# Altium PCB 400479.PcbDoc (part 1 of 2)
Units mm, origin at the board's own origin, x right, y up, seen from the top; angles counter-clockwise.
Board outline 46.04 x 15.24 mm, 4 copper layers (Top Layer, Mid-Layer 1, Mid-Layer 2, Bottom Layer), stack 2.007 mm thick; 83 components, 46 nets, 247 pads, 135 vias.
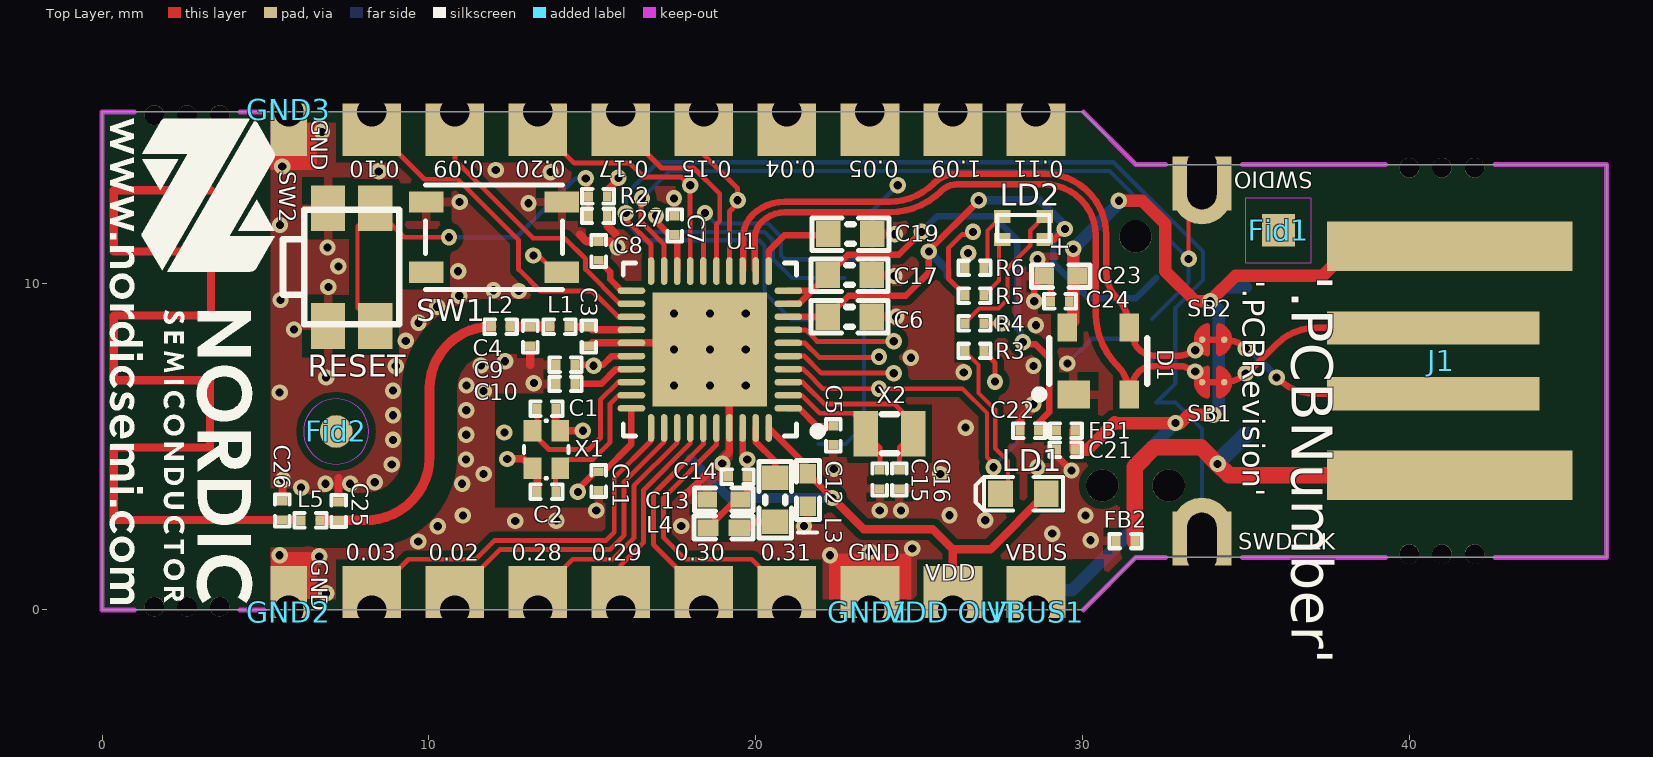
[diagram p0: Top Layer view]
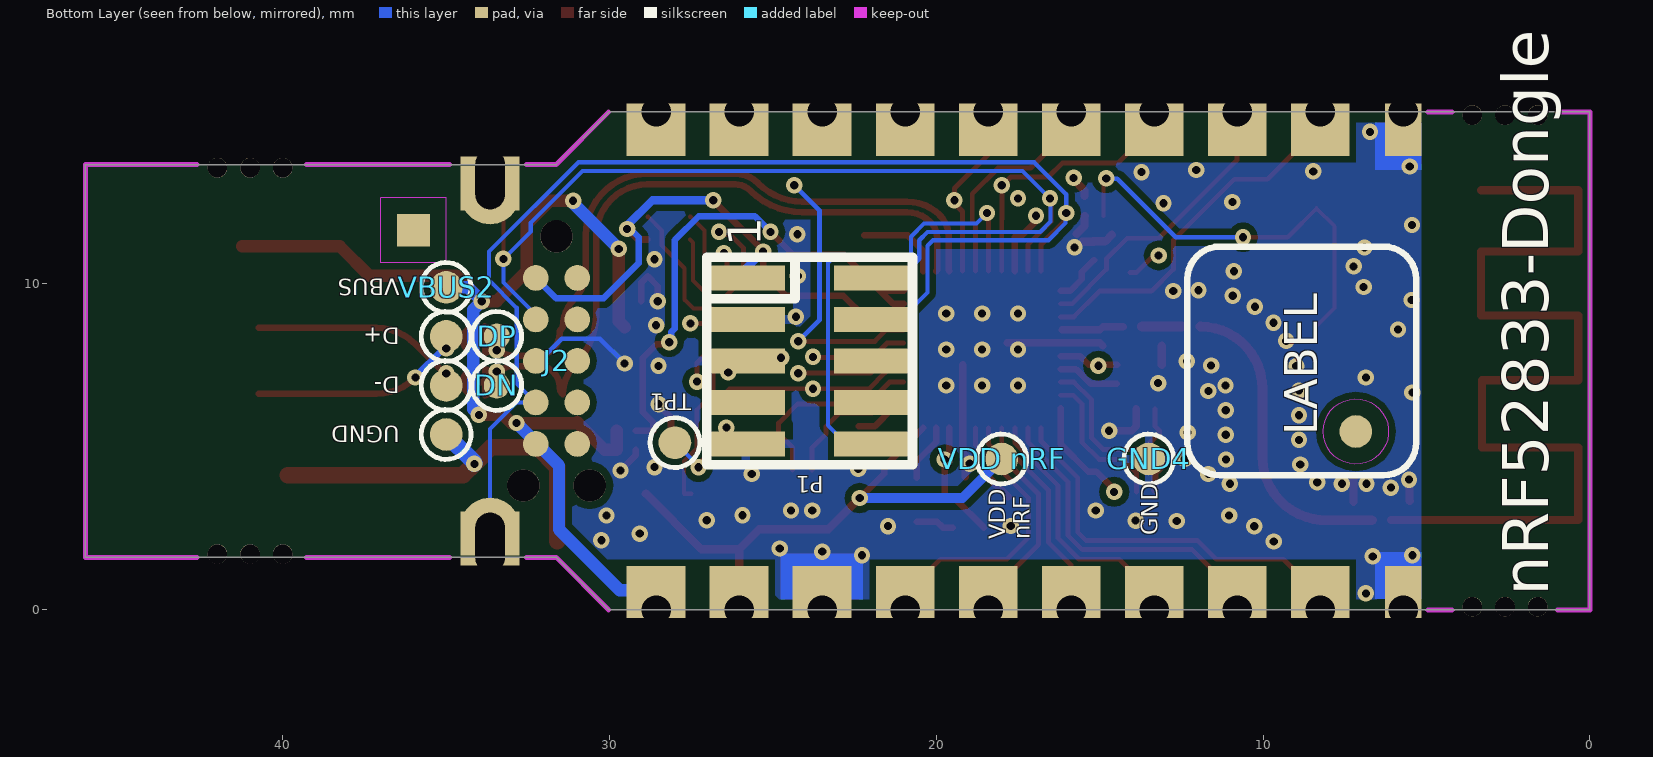
[diagram p1: Bottom Layer view, seen from below]
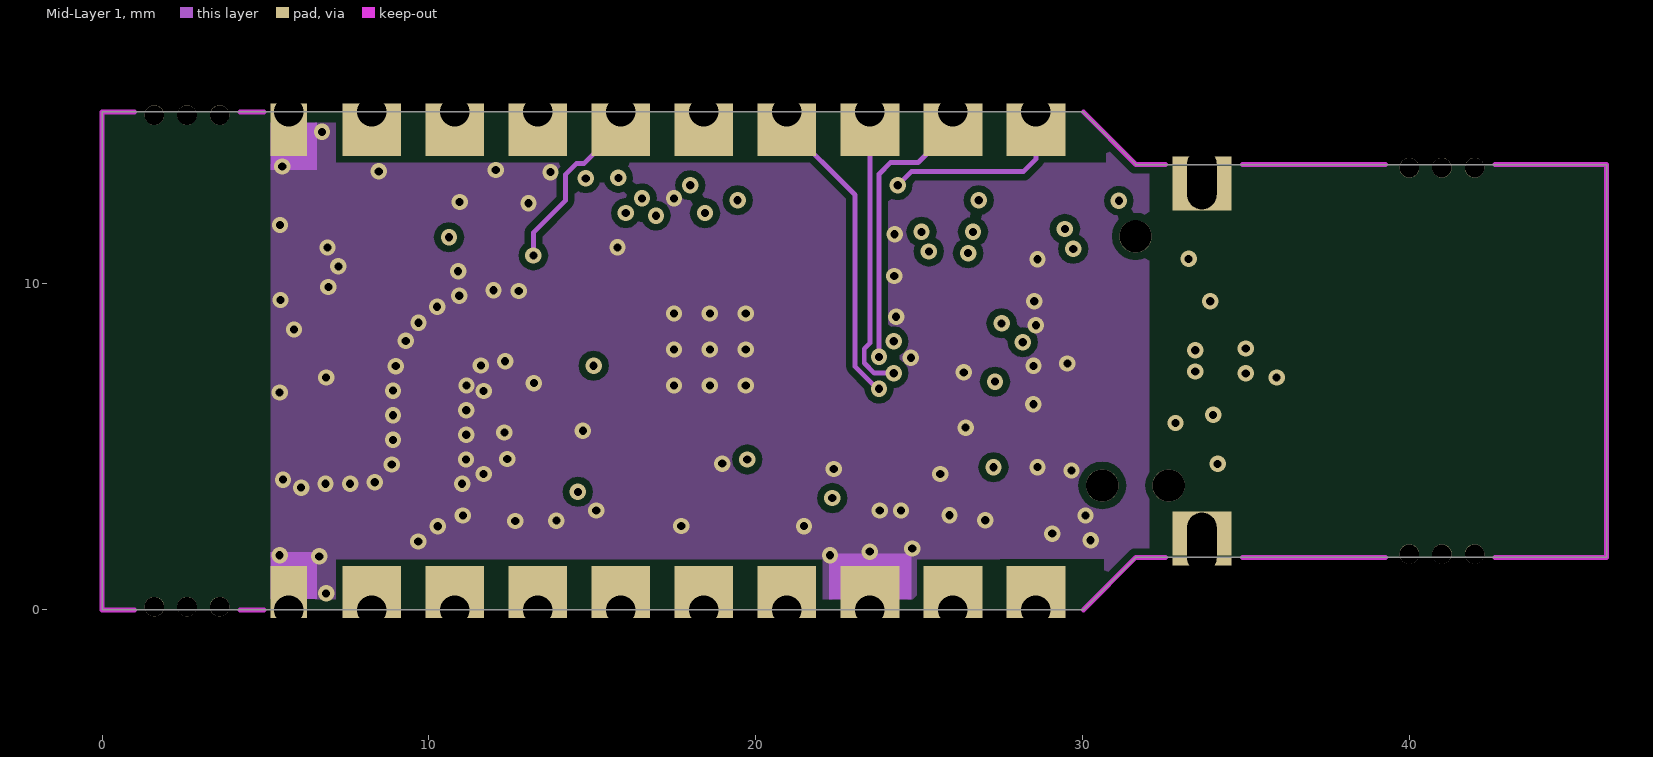
[diagram p2: Mid-Layer 1]
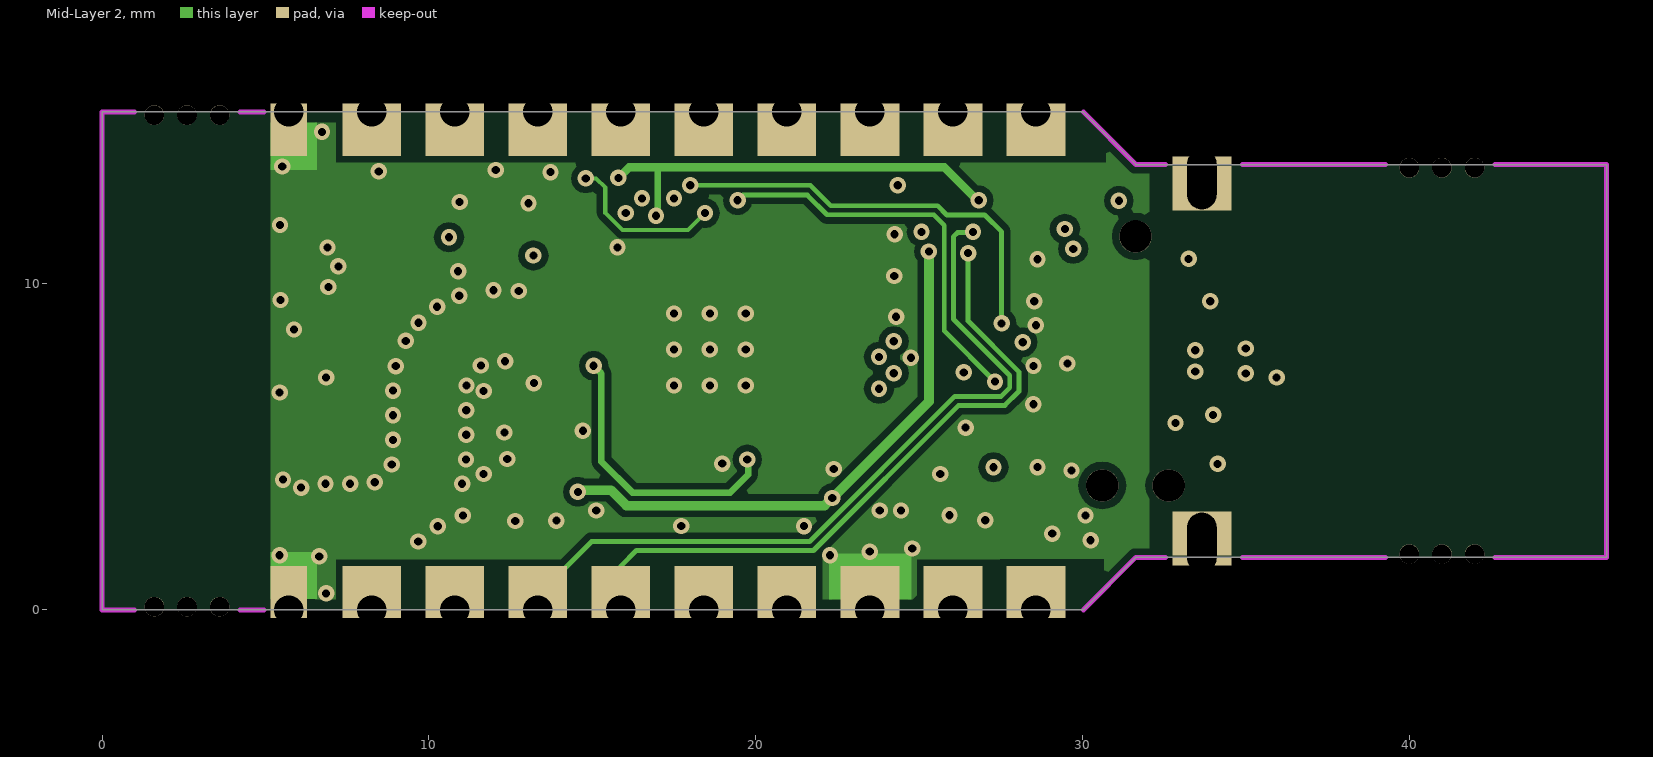
[diagram p3: Mid-Layer 2]

## Layer stack, top to bottom
Top Solder: solder mask 0.018, Solder Resist, Dk 3.5
Top Layer: signal copper 0.018
Dielectric1: prepreg 0.1, FR-4, Dk 4.1
Mid-Layer 1: signal copper 0.0356
Dielectric2: core 1.7, FR-4, Dk 4.5
Mid-Layer 2: signal copper 0.0356
Dielectric3: prepreg 0.1, FR-4, Dk 4.1
Bottom Layer: signal copper 0.018
Bottom Solder: solder mask 0.018, Solder Resist, Dk 3.5

## Board outline
0,0 0,15.24 30.027,15.24 31.637,13.63 46.039,13.63 46.039,1.61 31.637,1.61 30.027,0

## Design rules (kind name [scope] priority, off if disabled: settings)
Clearance ANT_Clerance [(InNet('ANT') or InNet('RF') or InNet('NetC4_2')) and (IsTrack or IsArc or IsVia) vs (InNamedPolygon('Top_Layer-GND')) or (InNamedPolygon('Bottom_Layer-GND')) or (InNamedPolygon('Mid_Layer_1-GND')) or (InNamedPolygon('Mid_Layer_2-GND'))] p1: gap=0.7 ignorepadtopadclearanceinfootprint=FALSE
Clearance NPTH [Not PadIsPlated And HoleSize > 0] p2: gap=0.229 ignorepadtopadclearanceinfootprint=FALSE except(0: Arc-Hole Track-Hole SMDPad-Hole THPad-Hole Via-Hole Fill-Hole Poly-Hole Region-Hole Text-Hole)
Clearance Polygon_Clearance [(InNamedPolygon('Top_Layer-GND')) or (InNamedPolygon('Bottom_Layer-GND')) or (InNamedPolygon('Mid_Layer_1-GND')) or (InNamedPolygon('Mid_Layer_2-GND'))] p3: gap=0.203 ignorepadtopadclearanceinfootprint=FALSE
Clearance SB_Clearance [HasFootprint('Solderbridge')] p4: gap=0.127 ignorepadtopadclearanceinfootprint=FALSE except(0: Arc-Hole Track-Hole SMDPad-Hole THPad-Hole Via-Hole Fill-Hole Poly-Hole Region-Hole Text-Hole)
Clearance [All] p5: gap=0.127 ignorepadtopadclearanceinfootprint=FALSE
ComponentClearance [All] p1 off: gap=0.254 collisioncheckmode=3 verticalgap=0.254 showdistances=FALSE
DiffPairsRouting [All] p1: maxlimit=2.54 minlimit=0.127 mostfreqgap=0.127 toplayer_maxgap=0.127 toplayer_minwidth=0.2 toplayer_maxwidth=0.2 toplayer_prefwidth=0.2 midlayer1_minwidth=0.381 midlayer1_maxwidth=0.381 midlayer1_prefwidth=0.381 midlayer2_minwidth=0.381 midlayer2_maxwidth=0.381 midlayer2_prefwidth=0.381 bottomlayer_maxgap=0.127 bottomlayer_minwidth=0.2 bottomlayer_maxwidth=0.2 bottomlayer_prefwidth=0.2 maxuncoupledlength=12.7
FabricationTestPointUsage TestPointUsage [All] p1: valid=0 allowmultiple=FALSE
FabricationTestpoint Testpoint [All] p1: side=3 testpointundercomponent=TRUE minsize=1.016 maxsize=2.54 preferedsize=1.524 minholesize=0 maxholesize=1.016 preferedholesize=0.813 testpointgrid=0.025 allowsidetop=TRUE allowsidebottom=TRUE usegrid=TRUE gridtolerance=0
Height [All] p1 off: minheight=0 maxheight=25.4 prefheight=12.7
HoleSize [All] p1: absolutevalues=TRUE maxlimit=2.54 minlimit=0.1 maxpercent=80.000 minpercent=20.000
MinimumAnnularRing [All] p1 off: minimumring=0.152
PolygonConnect PolygonConnect_1 [isVia and innet(gnd)] p1: connectstyle=Direct reliefconductorwidth=0.254 reliefentries=4 polygonreliefangle="90 Angle" airgapwidth=0.254
PolygonConnect [All] p2: connectstyle=Relief reliefconductorwidth=0.254 reliefentries=4 polygonreliefangle="90 Angle" airgapwidth=0.254
RoutingVias [All] p1: holewidth=0.25 width=0.5 viastyle="Through Hole" minholewidth=0.1 minwidth=0.3 maxholewidth=0.305 maxwidth=0.61
SilkToSolderMaskClearance SilkscreenOverComponentPads [IsPad] p1: minsilkscreentomaskgap=0.254 clearancetoexposedcopper=TRUE
SolderMaskExpansion [All] p1: expansion=0.076 istentingtop=FALSE
Width [All] p1: maxlimit=2.54 minlimit=0.127 preferedwidth=0.152 minimp=50.000000 maximp=50.000000 favimp=50.000000
23 further rules are at their usual default settings.

## Classes and differential pairs
differential pair D: +D_P -D_N

## Components (designator, comment, footprint, x,y, rotation, side; value= is the part's Value field where it differs from the comment)
0.02 "CH" Castellated_Hole_0.9mm 10.795,0 r0 top locked
0.03 "CH" Castellated_Hole_0.9mm 8.255,0 r0 top locked
0.04 "CH" Castellated_Hole_0.9mm 20.955,15.24 r180 top locked
0.05 "CH" Castellated_Hole_0.9mm 23.495,15.24 r180 top locked
0.09 "CH" Castellated_Hole_0.9mm 10.795,15.24 r180 top locked
0.10 "CH" Castellated_Hole_0.9mm 8.255,15.24 r180 top locked
0.11 "CH" Castellated_Hole_0.9mm 28.575,15.24 r180 top locked
0.15 "CH" Castellated_Hole_0.9mm 18.415,15.24 r180 top locked
0.17 "CH" Castellated_Hole_0.9mm 15.875,15.24 r180 top locked
0.20 "CH" Castellated_Hole_0.9mm 13.335,15.24 r180 top locked
0.28 "CH" Castellated_Hole_0.9mm 13.335,0 r0 top locked
0.29 "CH" Castellated_Hole_0.9mm 15.875,0 r0 top locked
0.30 "CH" Castellated_Hole_0.9mm 18.415,0 r0 top locked
0.31 "CH" Castellated_Hole_0.9mm 20.955,0 r0 top locked
1.09 "CH" Castellated_Hole_0.9mm 26.035,15.24 r180 top locked
C1 "12pF" CAPC0603X03L_C 13.596,6.154 r0 top
C2 "12pF" CAPC0603X03L_C 13.596,3.614 r180 top
C3 "1.0pF" CAPC0603X03L_C 14.9,8.37 r90 top
C4 "1.2pF" CAPC0603X03L_C 13.1,8.37 r90 top
C5 "100nF" CAPC0603X03L_C 22.375,5.345 r270 top
C6 "4.7µF" CAPC1608X06L 22.875,8.97 r0 top
C7 "100nF" CAPC0603X03L_C 17.525,11.77 r90 top
C8 "820pF" CAPC0603X03L_C 15.2,10.987 r90 top
C9 "N.C." CAPC0603X03L_C_NC 14.18,7.5 r0 top
C10 "100pF" CAPC0603X03L_C 14.18,6.916 r180 top
C11 "100nF" CAPC0603X03L_C 15.2,3.945 r270 top
C12 "1.0µF" CAPC1005X04L 21.6,3.67 r270 top
C13 "1.0µF" CAPC1005X04L 19.025,3.38 r0 top
C14 "47nF" CAPC0603X03L_C 19.451,4.08 r180 top
C15 "12pF" CAPC0603X03L_C 23.8,3.995 r270 top
C16 "12pF" CAPC0603X03L_C 24.4,3.995 r270 top
C17 "4.7µF" CAPC1608X06L 22.875,10.245 r0 top
C19 "4.7µF" CAPC1608X06L 22.9,11.5 r0 top
C21 "10nF" CAPC0603X03L_C 29.489,4.902 r0 top locked
C22 "100nF" CAPC0603X03L_C 28.372,5.486 r0 top locked
C23 "4.7µF" CAPC1005X04L 29.337,10.211 r0 top locked
C24 "100nF" CAPC0603X03L_C 29.312,9.449 r0 top locked
C25 "N.C." CAPC0603X03L_C_NC 7.239,3.023 r90 top locked
C26 "1.7pF" CAPC0603X03L_C 5.512,3.048 r270 top locked
C27 "100nF" CAPC0603X03L_C 15.173,12.057 r180 top
D1 "PRTR5V0U2X" SOT190P230X110-4L 30.48,7.62 r90 top locked
D+ "Ø1.0mm,SMD" TP_SMD_D1.0mm#1 35,8.37 r180 bottom locked
D- "Ø1.0mm,SMD" TP_SMD_D1.0mm#1 35,6.87 r180 bottom locked
DN "Ø1.0mm,SMD" TP_SMD_D1.0mm#2 33.45,6.87 r270 bottom locked
DP "Ø1.0mm,SMD" TP_SMD_D1.0mm#2 33.45,8.37 r270 bottom locked
FB1 "120R/0.85A" INDC0603X03L_C 29.489,5.486 r180 top locked
FB2 "120R/0.85A" INDC0603X03L_C 31.318,2.108 r180 top locked
Fid1 "Fiducial mark" Fiducial_Square 36,11.62 r0 top locked value=N.A.
Fid2 "Fiducial mark" Fiducial 7.163,5.461 r0 top locked value=N.A.
GND1 "GND" Castellated_Hole_0.9mm 23.495,0 r0 top locked
GND2 "GND" Castellated_Hole_0.9mm_S 5.715,0 r0 top locked
GND3 "GND" Castellated_Hole_0.9mm_S 5.715,15.24 r180 top locked
GND4 "GND" TP_SMD_D1.0mm#1 13.5,4.62 r180 bottom locked
J1 "USB-A" USB-A-PCB 41.039,7.63 r180 top locked
J2 "TC2050-IDC" TC2050-IDC-NLFP 31.623,7.62 r270 bottom locked
L1 "4.7nH" INDC0603X03L_C 14,8.67 r180 top
L2 "2.2nH" INDC0603X03L_C 12.2,8.67 r180 top
L3 "10µH" INDC1608X06L 20.6,3.37 r90 top
L4 "15nH" INDC1005X04L 19.021,2.52 r0 top
L5 "2.7nH" INDC0603X03L_C 6.375,2.743 r180 top locked
LD1 "L0603G" LED_0603_G 28.194,3.556 r0 top locked
LD2 "LED RGB" LED_RGB_0603 28.194,11.684 r90 top locked
P1 "Pin Header 2x5, 1.27mm" HDR_2x5-SMD-1.27mm-NC 23.876,7.62 r270 bottom locked
R2 "10k" RESC0603X03L_C 15.175,12.657 r0 top
R3 "220R" RESC0603X03L_C 26.695,7.925 r0 top locked
R4 "1k2" RESC0603X03L_C 26.695,8.771 r0 top locked
R5 "2k2" RESC0603X03L_C 26.695,9.618 r0 top locked
R6 "390R" RESC0603X03L_C 26.695,10.465 r0 top locked
SB1 "Solderbridge" Solderbridge_Shorted 34,6.97 r0 top locked net-tie
SB2 "Solderbridge" Solderbridge_Shorted 34,8.27 r0 top locked net-tie
SW1 "PB SW" C&K_PTS810 11.995,11.406 r180 top
SW2 "PTS840 GK SMTR LFS" EVQP7A_J_B_K 7.638,10.49 r270 top
SWDCLK "CH" Castellated_Hole_0.9mm_D 33.655,2.06 r0 top locked
SWDIO "CH" Castellated_Hole_0.9mm_D 33.655,13.18 r180 top locked
TP1 "Ø1.0mm,SMD" TP_SMD_D1.0mm#1 28,5.12 r180 bottom locked
U1 "nRF52833-QDAA" QFN40P500X500X50_HS-41N 18.6,7.97 r180 top locked
UGND "Ø1.0mm,SMD" TP_SMD_D1.0mm#1 35,5.37 r180 bottom locked
VBUS1 "VBUS" Castellated_Hole_0.9mm 28.575,0 r0 top locked
VBUS2 "VBUS" TP_SMD_D1.0mm#1 35,9.87 r180 bottom locked
"VDD nRF" "Ø1.0mm,SMD" TP_SMD_D1.0mm#1 18,4.62 r180 bottom locked
"VDD OUT" "CH" Castellated_Hole_0.9mm 26.035,0 r0 top locked
X1 "32MHz" BT-XTAL_1612 13.596,4.909 r270 top
X2 "32.768kHz" XTAL_2012 24.1,5.395 r0 top

## Footprints (in the part's own frame and the unit in brackets; to place one, negate y for a bottom-side part, rotate by r counter-clockwise, add the part's x,y. Pads: shape width x height; smd on the part's side, far side on the other; paste and mask are expansions set on the pad)
BT-XTAL_1612 [mm] "Crystal 1.6 x 1.2 mm"
  rect 0.65x0.55 smd: 1(-0.575,-0.425) 2(0.575,-0.425) 3(0.575,0.425) 4(-0.575,0.425)
  silkscreen extent -0.88,-0.68 0.88,0.68, body extent -0.83,-0.63 0.83,0.63, height 0.41
C&K_PTS810 [mm] "Microminiature SMT Top Actuated"
  rect 1.05x0.65 smd: 0(2.075,1.075) 1(-2.075,1.075) 2(-2.075,-1.075) 2(2.075,-1.075)
  silkscreen extent -2.1,-1.6 2.1,1.6, body extent -2.29,-1.6 2.29,1.6, height 2.5
CAPC0603X03L_C [mm] "Chip Capacitor, 2-Leads, Body 0.6x0.3mm, IPC High Density"
  rect 0.27x0.3 smd: 1(-0.285,0) 2(0.285,0)
  silkscreen extent -0.49,-0.22 0.49,0.22, body extent -0.3,-0.15 0.31,0.15, height 0.3
CAPC0603X03L_C_NC [mm] "Chip Capacitor, 2-Leads, Body 0.6x0.3mm, IPC High Density"
  rect 0.27x0.3 smd mask+0.05: 1(-0.285,0) 2(0.285,0)
  silkscreen extent -0.49,-0.22 0.49,0.22
CAPC1005X04L [mm] "Chip Capacitor, 2-Leads, Body 1.0x0.5mm, IPC High Density"
  rect 0.6x0.5 smd: 1(-0.5,0) 2(0.5,0)
  silkscreen extent -0.9,-0.35 0.9,0.35, body extent -0.51,-0.25 0.51,0.25, height 0.5
CAPC1608X06L [mm] "Chip Capacitor, 2-Leads, Body 1.6x0.8mm, IPC High Density"
  rect 0.75x0.8 smd: 1(-0.675,0) 2(0.675,0)
  silkscreen extent -1.17,-0.5 1.17,0.5, body extent -0.8,-0.43 0.8,0.43, height 0.8
Castellated_Hole_0.9mm [mm]
  rect 1.8x0.25 hole 0.25 square: 1(0,-0.126)
  rect 1.8x1.35 hole 0.9 copper offset 0,0.675: 1(0,0)
Castellated_Hole_0.9mm_D [mm]
  rect 1.8x0.25 hole 0.25 square: 1(0,-0.576)
  rect 1.8x1.35 hole 0.9 slot 1.83 at 90 deg copper offset 0,0.275: 1(0,0)
  round 1.8 smd paste-5: 1(0,0.48)
  round 1.8 smd far side paste-5: 1(0,0.48)
Castellated_Hole_0.9mm_S [mm]
  rect 1.118x0.25 hole 0.25 square: 1(0,-0.126)
  rect 1.118x1.35 hole 0.9 copper offset 0,0.675: 1(0,0)
EVQP7A_J_B_K [mm] "Subminiature Side Actuated Tact Switch for SMT"
  rect 1.4x1.05 smd: 1(-1.8,0.725) 1(1.8,0.725) 2(-1.8,-0.725) 2(1.8,-0.725)
  silkscreen extent -1.75,-2.1 1.75,1.45, body extent -2.35,-2.1 2.35,1.45, height 1.35
Fiducial [mm] "Fiducial Mark"
  round 1 smd paste-0.6 mask+0.5: 0(0,0)
  round 1 smd far side paste+0 mask+0.5: 0(0,0)
  Top Layer keep-out circle w0.01: c0,0 r1
  Bottom Layer keep-out circle w0.01: c0,0 r1
Fiducial_Square [mm] "Fiducial Mark"
  rect 1x1 smd paste-10 mask+0.5: 0(0,0)
  rect 1x1 smd far side paste-10 mask+0.5: 0(0,0)
  Top Layer keep-out lines w0.01: -1,-1 -1,1 1,1 1,-1 -1,-1
  Bottom Layer keep-out lines w0.01: -1,-1 1,-1 1,1 -1,1 -1,-1
HDR_2x5-SMD-1.27mm-NC [mm] "SMT MICRO HEADER, (1,27) .050\""
  rect 0.76x2.4 smd: 1(-2.54,-1.95) 2(-2.54,1.95) 3(-1.27,-1.95) 4(-1.27,1.95) 5(0,-1.95) 6(0,1.95) 7(1.27,-1.95) 8(1.27,1.95) 9(2.54,-1.95) 10(2.54,1.95)
  silkscreen extent -3.18,-3.15 3.18,3.15
INDC0603X03L_C [mm] "Chip Inductor, 2-Leads, Body 0.6x0.3mm, IPC High Density"
  rect 0.27x0.3 smd: 1(-0.285,0) 2(0.285,0)
  silkscreen extent -0.49,-0.22 0.49,0.22, body extent -0.31,-0.16 0.31,0.16, height 0.26
INDC1005X04L [mm] "Chip Inductor, 2-Leads, Body 1.0x0.5mm, IPC High Density"
  rect 0.65x0.5 smd: 1(-0.475,0) 2(0.475,0)
  silkscreen extent -0.9,-0.35 0.9,0.35, body extent -0.5,-0.3 0.5,0.3, height 0.5
INDC1608X06L [mm] "Chip Inductor, 2-Leads, Body 1.6x0.8mm, IPC High Density"
  rect 0.75x0.8 smd: 1(-0.675,0) 2(0.675,0)
  silkscreen extent -1.17,-0.5 1.17,0.5, body extent -0.8,-0.48 0.8,0.48, height 0.8
LED_0603_G [mil] "SMD Super Bright LED, GREEN"
  rect 30x32 smd: 1(-27.5,0) 2(27.5,0)
  silkscreen extent -58,-20 48,20, body extent -32,-16 32,16, height 24
LED_RGB_0603 [mm]
  rect 0.4x0.5 smd paste+0: 1(0.35,-0.65) 2(-0.35,0.65) 3(0.35,0.65) 4(-0.35,-0.65)
  silkscreen extent -0.4,-0.8 0.4,0.8, body extent -0.4,-0.8 0.4,0.8, height 0.5
QFN40P500X500X50_HS-41N [mm] "QFN, 40-Leads, Body 5.00x5.00mm, Pitch 0.40mm, Thermal Pad 3.60x3.60mm, IPC Medium Density"
  oval 0.85x0.2 smd: 1(-2.4,1.8) 2(-2.4,1.4) 3(-2.4,1) 4(-2.4,0.6) 5(-2.4,0.2) 6(-2.4,-0.2) 7(-2.4,-0.6) 8(-2.4,-1) 9(-2.4,-1.4) 10(-2.4,-1.8) 21(2.4,-1.8) 22(2.4,-1.4) 23(2.4,-1) 24(2.4,-0.6) 25(2.4,-0.2) 26(2.4,0.2) 27(2.4,0.6) 28(2.4,1) 29(2.4,1.4) 30(2.4,1.8)
  oval 0.2x0.85 smd: 11(-1.8,-2.4) 12(-1.4,-2.4) 13(-1,-2.4) 14(-0.6,-2.4) 15(-0.2,-2.4) 16(0.2,-2.4) 17(0.6,-2.4) 18(1,-2.4) 19(1.4,-2.4) 20(1.8,-2.4) 31(1.8,2.4) 32(1.4,2.4) 33(1,2.4) 34(0.6,2.4) 35(0.2,2.4) 36(-0.2,2.4) 37(-0.6,2.4) 38(-1,2.4) 39(-1.4,2.4) 40(-1.8,2.4)
  rect 3.5x3.5 smd: 41(0,0)
  silkscreen extent -3.43,-2.65 2.65,2.65, body extent -2.5,-2.5 2.5,2.5, height 0.5
RESC0603X03L_C [mm] "Chip Resistor, 2-Leads, Body 0.6x0.3mm, IPC High Density"
  rect 0.27x0.3 smd: 1(-0.285,0) 2(0.285,0)
  silkscreen extent -0.49,-0.22 0.49,0.22, body extent -0.3,-0.15 0.3,0.15, height 0.23
Solderbridge_Shorted [mm]
  round 0.2 smd paste-10: 1(-0.338,0) 2(0.338,0)
  Top Layer region: 0.102,0.432 0.178,0.505 0.296,0.467 0.361,0.424 0.434,0.351 0.488,0.292 0.546,0.193 0.574,0.099 0.569,-0.122 0.544,-0.193 0.46,-0.33 0.376,-0.411 0.284,-0.469 0.183,-0.5 0.132,-0.483 0.102,-0.43
  Top Layer region: -0.102,-0.432 -0.178,-0.505 -0.296,-0.467 -0.361,-0.424 -0.434,-0.351 -0.488,-0.292 -0.546,-0.193 -0.574,-0.099 -0.569,0.122 -0.544,0.193 -0.46,0.33 -0.376,0.411 -0.284,0.469 -0.183,0.5 -0.132,0.483 -0.102,0.43
  Top Layer lines w0.152: -0.178,-0.431 cw(c-0.068,0) -0.178,0.431 ; 0.178,-0.431 ccw(c0.068,0) 0.178,0.431
  Top Layer lines w0.203: -0.338,0 0.338,0
SOT190P230X110-4L [mm] "SOT143, 4-Leads, Body 3.0x2.5mm (max), Pitch 1.90mm, IPC High Density"
  rect 0.85x1 smd: 1(-1.025,0.75)
  rect 0.85x0.6 smd: 2(-1.025,-0.95) 3(1.025,-0.95) 4(1.025,0.95)
  silkscreen extent -1.15,-1.5 0.7,1.92, body extent -1.21,-1.46 1.21,1.46, height 1
TC2050-IDC-NLFP [mil]
  round 39 hole 39 unplated mask+3: 0(-150,0) 0(150,-40) 0(150,40)
  round 31 smd paste-196.85: 1(-100,-25) 2(-50,-25) 3(0,-25) 4(50,-25) 5(100,-25) 6(100,25) 7(50,25) 8(0,25) 9(-50,25) 10(-100,25)
  Top Layer pour cut-out: -100,25 -100,-25 100,-25 100,25
TP_SMD_D1.0mm#1 [mm] "Test point - pad 1.0mm"
  round 1 smd paste-5: 1(0,0)
  silkscreen extent -0.76,-0.76 0.76,0.76
TP_SMD_D1.0mm#2 [mm] "Test point - pad 1.0mm"
  round 0.8 smd paste-5: 1(0,0)
  silkscreen extent -0.76,-0.76 0.76,0.76
USB-A-PCB [mil]
  rect 296x60 smd paste-196.85: 1(-7.87,-137.8) 4(-7.87,138)
  rect 256x40 smd paste-196.85: 2(12,-39.37) 3(12,40)
XTAL_2012 [mm] "XTAL SMD 2.0 x 1.2 mm"
  rect 0.75x1.4 smd: 1(-0.725,0) 2(0.725,0)
  silkscreen extent -0.24,-0.6 0.24,0.6, body extent -1,-0.61 1,0.61, height 0.6

## Part data
0.02 0.03 0.04 0.05 0.09 0.10 0.11 0.15 0.17 0.20 0.28 0.29 0.30 0.31 1.09 GND1 VBUS1 "VDD OUT": library part "Castellated Hole 0.9mm", "Castellated Hole 0.9mm", Manufacturer=N.A., Artikkelnr Noca=N.A., Author=rsk, Component Class=Connectors, ComponentLink1Description=Datasheet, ComponentLink1URL=N.A., ComponentLink2Description="Supplier link", ComponentLink2URL=N.A., Footprint Doc=N.A., HelpURL=N.A., LatestRevisionDate=2016-08-22, Manufacturer Part Number=N.A., Note=N.A., Pad Count=1, Part Number="Castellated Hole 0.9mm", Part number IPS=N.A., Part number Norautron=N.A., PartId=100500565, Published=2016-08-22, Supplier 1=N.A., Supplier 2=N.A., Supplier Part Number 1=N.A., Supplier Part Number 2=N.A.
C1 C2 C15 C16: library part C0201-12p, "Capacitor, NP0, ±2%", Manufacturer=N.A., Part number IPS=00000007848, Artikkelnr Noca=N.A., Author=rsk, Component Class=Capacitors, ComponentLink1Description=Datasheet, ComponentLink1URL=N.A., ComponentLink2Description="Supplier link", ComponentLink2URL=N.A., Footprint Doc=0201, HelpURL=N.A., LatestRevisionDate=2017-11-09, Manufacturer Part Number=N.A., Note=25V, Pad Count=2, Part Number=C0201-12p, Part number Norautron=N.A., PartId=100200033, Published=2014-11-13, Supplier 1=N.A., Supplier 2=N.A., Supplier Part Number 1=N.A., Supplier Part Number 2=N.A.
C3: library part C0201-1.0p, "Capacitor, NP0, ±0.05pF, 50V", Manufacturer=N.A., Part number IPS=00000001247, Artikkelnr Noca=N.A., Author=rsk, Component Class=Capacitors, ComponentLink1Description=Datasheet, ComponentLink1URL=N.A., ComponentLink2Description="Supplier link", ComponentLink2URL=N.A., Footprint Doc=0201, HelpURL=N.A., LatestRevisionDate=2018-10-22, Manufacturer Part Number=N.A., Note=50V, Pad Count=2, Part Number=C0201-1.0p, Part number Norautron=N.A., PartId=100200014, Published=2014-11-13, Supplier 1=N.A., Supplier 2=N.A., Supplier Part Number 1=N.A., Supplier Part Number 2=N.A.
C4: library part C0201-1.2p, "Capacitor, C0G, ±0.1pF, 50V", Manufacturer=N.A., Part number IPS=00000003190, Artikkelnr Noca=N.A., Author=rsk, Component Class=Capacitors, ComponentLink1Description=Datasheet, ComponentLink1URL=N.A., ComponentLink2Description="Supplier link", ComponentLink2URL=N.A., Footprint Doc=0201, HelpURL=N.A., LatestRevisionDate=2020-10-13, Manufacturer Part Number=N.A., Note="Chip Cap 1%", Pad Count=2, Part Number=C0201-1.2p, Part number Norautron=N.A., PartId=100200015, Published=2014-11-13, Supplier 1=N.A., Supplier 2=N.A., Supplier Part Number 1=N.A., Supplier Part Number 2=N.A.
C5 C7 C11 C22 C24 C27: library part C0201-100n, "Capacitor, X5R, ±10%", Manufacturer=N.A., Part number IPS="00000001248, 00000002505", Artikkelnr Noca=N.A., Author=rsk, Component Class=Capacitors, ComponentLink1Description=Datasheet, ComponentLink1URL=N.A., ComponentLink2Description="Supplier link", ComponentLink2URL=N.A., Footprint Doc=0201, HelpURL=N.A., LatestRevisionDate=2017-11-09, Manufacturer Part Number=N.A., Note=16V, Pad Count=2, Part Number=C0201-100n, Part number Norautron=N.A., PartId=100200078, Published=2014-11-13, Supplier 1=N.A., Supplier 2=N.A., Supplier Part Number 1=N.A., Supplier Part Number 2=N.A.
C6 C19: library part C0603-4µ7-6.3V-X7R, "Capacitor, X7R, ±10%, 6.3V", Manufacturer="Samsung Electro-Mechanics America", Manufacturer Part Number=CL10B475KQ8NQNC, Part number IPS=00000002541, Part number Norautron=N.A., Supplier Part Number 1=1276-2087-1-ND, Artikkelnr Noca=20039473, Author=rsk, Component Class=Capacitors, ComponentLink1Description=Datasheet, ComponentLink1URL=N.A., ComponentLink2Description="Supplier link", ComponentLink2URL=N.A., Footprint Doc=0603, HelpURL=http://media.digikey.com/pdf/Data%20Sheets/Samsung%20PDFs/CL10B475KQ8NQNC_Spec.pdf, LatestRevisionDate=2015-06-10, Note=6.3V, Pad Count=2, Part Number=C0603-4µ7-6.3V-X7R, PartId=100200350, Published=2015-06-10, Supplier 1=Digi-Key, Supplier 2=N.A., Supplier Part Number 2=N.A.
C8: library part C0201-820p, "Capacitor, X7R, ±10%", Manufacturer=N.A., Part number IPS=00000001249, Artikkelnr Noca=N.A., Author=rsk, Component Class=Capacitors, ComponentLink1Description=Datasheet, ComponentLink1URL=N.A., ComponentLink2Description="Supplier link", ComponentLink2URL=N.A., Footprint Doc=0201, HelpURL=N.A., LatestRevisionDate=2017-11-09, Manufacturer Part Number=N.A., Note=25V, Pad Count=2, Part Number=C0201-820p, Part number Norautron=N.A., PartId=100200055, Published=2014-11-13, Supplier 1=N.A., Supplier 2=N.A., Supplier Part Number 1=N.A., Supplier Part Number 2=N.A.
C9 C25: library part C0201-N.C., "Not mounted", Manufacturer=N.A., Artikkelnr Noca=N.A., Assembly="Not mounted", Author=rsk, Component Class=Capacitors, ComponentLink1Description=Datasheet, ComponentLink1URL=N.A., ComponentLink2Description="Supplier link", ComponentLink2URL=N.A., Footprint Doc=0201, HelpURL=N.A., LatestRevisionDate=2014-11-13, Manufacturer Part Number=N.A., Note="Chip Cap", Pad Count=2, Part Number=C0201-N.C., Part number IPS=N.A., Part number Norautron=N.A., PartId=100200001, Published=2014-11-13, Supplier 1=N.A., Supplier 2=N.A., Supplier Part Number 1=N.A., Supplier Part Number 2=N.A.
C10: library part C0201-100p, "Capacitor, NP0, ±2%, 25V", Manufacturer=Murata, Manufacturer Part Number=GRM0335C1E101GA01, Part number IPS=00000007853, Part number Norautron=N.A., Artikkelnr Noca=N.A., Author=rsk, Component Class=Capacitors, ComponentLink1Description=Datasheet, ComponentLink1URL=N.A., ComponentLink2Description="Supplier link", ComponentLink2URL=N.A., Footprint Doc=0201, HelpURL=N.A., LatestRevisionDate=2019-04-16, Note=25V, Pad Count=2, Part Number=C0201-100p, PartId=100200044, Published=2019-04-16, Supplier 1=N.A., Supplier 2=N.A., Supplier Part Number 1=N.A., Supplier Part Number 2=N.A.
C12 C13: library part C0402-1µ0, "Capacitor, X5R, ±5%, 6.3V", Manufacturer=N.A., Part number IPS="00000007786, 00000003457", Supplier Part Number 1=1276-1444-1-ND, Artikkelnr Noca=20039235, Author=rsk, Component Class=Capacitors, ComponentLink1Description=Datasheet, ComponentLink1URL=N.A., ComponentLink2Description="Supplier link", ComponentLink2URL=N.A., Footprint Doc=0402, HelpURL=N.A., LatestRevisionDate=2016-08-22, Manufacturer Part Number=N.A., Note=6.3V, Pad Count=2, Part Number=C0402-1µ0, Part number Norautron=N.A., PartId=100200190, Published=2009-05-08, Supplier 1=Digi-Key, Supplier 2=N.A., Supplier Part Number 2=N.A.
C14: library part C0201-47n, "Capacitor, X5R, ±10%", Manufacturer=N.A., Part number IPS=00000001250, Artikkelnr Noca=N.A., Author=rsk, Component Class=Capacitors, ComponentLink1Description=Datasheet, ComponentLink1URL=N.A., ComponentLink2Description="Supplier link", ComponentLink2URL=N.A., Footprint Doc=0201, HelpURL=N.A., LatestRevisionDate=2017-11-09, Manufacturer Part Number=N.A., Note=10V, Pad Count=2, Part Number=C0201-47n, Part number Norautron=N.A., PartId=100200074, Published=2014-11-13, Supplier 1=N.A., Supplier 2=N.A., Supplier Part Number 1=N.A., Supplier Part Number 2=N.A.
C17: library part C0603-4µ7-10V-X7S, "Capacitor, X7S, ±10%, 10V", Manufacturer=N.A., Part number IPS=00000001779, Supplier Part Number 1=445-14258-1-ND, Artikkelnr Noca=20030013, Author=rsk, Component Class=Capacitors, ComponentLink1Description=Datasheet, ComponentLink1URL=N.A., ComponentLink2Description="Supplier link", ComponentLink2URL=N.A., Footprint Doc=0603, HelpURL=N.A., LatestRevisionDate=2016-08-15, Manufacturer Part Number=N.A., Note=10V, Pad Count=2, Part Number=C0603-4µ7-10V-X7S, Part number Norautron=N.A., PartId=100200351, Published=2016-08-15, Supplier 1=Digi-Key, Supplier 2=N.A., Supplier Part Number 2=N.A.
C21: library part C0201-10n, "Capacitor, X7R, ±10%", Manufacturer=N.A., Part number IPS=00000003480, Artikkelnr Noca=N.A., Author=rsk, Component Class=Capacitors, ComponentLink1Description=Datasheet, ComponentLink1URL=N.A., ComponentLink2Description="Supplier link", ComponentLink2URL=N.A., Footprint Doc=0201, HelpURL=N.A., LatestRevisionDate=2017-11-09, Manufacturer Part Number=N.A., Note=10V, Pad Count=2, Part Number=C0201-10n, Part number Norautron=N.A., PartId=100200067, Published=2014-11-13, Supplier 1=N.A., Supplier 2=N.A., Supplier Part Number 1=N.A., Supplier Part Number 2=N.A.
C23: library part C0402-4µ7, "Capacitor, X5R, ±20%", Manufacturer=N.A., Part number IPS="00000001251, 00000007165", Supplier Part Number 1=490-13252-1-ND, Artikkelnr Noca=20039482, Author=rsk, Component Class=Capacitors, ComponentLink1Description=Datasheet, ComponentLink1URL=N.A., ComponentLink2Description="Supplier link", ComponentLink2URL=N.A., Footprint Doc=0402, HelpURL=N.A., LatestRevisionDate=2017-11-09, Manufacturer Part Number=N.A., Note=10V, Pad Count=2, Part Number=C0402-4µ7, Part number Norautron=N.A., PartId=100200193, Published=2009-05-08, Supplier 1=Digi-Key, Supplier 2=N.A., Supplier Part Number 2=N.A.
C26: library part C0201-1.7p, "Chip Cap 0201", Manufacturer=N.A., Artikkelnr Noca=N.A., Author=rsk, Component Class=Capacitors, ComponentLink1Description=Datasheet, ComponentLink1URL=N.A., ComponentLink2Description="Supplier link", ComponentLink2URL=N.A., Footprint Doc=0201, HelpURL=N.A., LatestRevisionDate=2019-12-04, Manufacturer Part Number=N.A., Note="Chip Cap 1%", Pad Count=2, Part Number=C0201-1.7p, Part number IPS=N.A., Part number Norautron=N.A., PartId=100200018, Published=2014-11-13, Supplier 1=N.A., Supplier 2=N.A., Supplier Part Number 1=N.A., Supplier Part Number 2=N.A.
D1: "Ultra low capacitance double rail-to-rail ESD protection diode", Manufacturer="NXP Semiconductors", Part number IPS=00000009951, Part number Norautron=N.A., Supplier Part Number 1=568-4140-1-ND, Artikkelnr Noca=10069015, Author=rsk, Component Class=Semiconductors, ComponentLink1Description=Datasheet, ComponentLink1URL=N.A., ComponentLink2Description="Supplier link", ComponentLink2URL=N.A., Footprint Doc=SOT-143B, HelpURL=http://www.farnell.com/datasheets/109718.pdf, LatestRevisionDate=2017-11-09, Manufacturer Part Number=PRTR5V0U2X, Note=N.A., Pad Count=4, Part Number=PRTR5V0U2X, PartId=101300082, Published=2012-06-11, Supplier 1=Digi-Key, Supplier 2=Farnell, Supplier Part Number 2=152-4157
D+ D- DN DP GND4 TP1 UGND VBUS2 "VDD nRF": library part TP_SMD_Ø1.0MM, "1.0mm circular SMD testpad", Manufacturer="Nordic Semiconductor", Manufacturer Part Number=N.A., Artikkelnr Noca=N.A., Author=rsk, Component Class=Connectors, ComponentLink1Description=Datasheet, ComponentLink1URL=N.A., ComponentLink2Description="Supplier link", ComponentLink2URL=N.A., Footprint Doc=TP_SMD_Ø1.0mm, HelpURL=N.A., LatestRevisionDate=2021-03-05, Note=N.A., Pad Count=1, Part Number=TP_SMD_Ø1.0MM, Part number IPS=N.A., Part number Norautron=N.A., PartId=100500475, Published=2013-06-11, Supplier 1=N.A., Supplier 2=N.A., Supplier Part Number 1=N.A., Supplier Part Number 2=N.A.
FB1 FB2: library part FB0201-120R@100M-850mA, "Ferrite Bead, 120 Ohm @ 100MHz, 850mA, 150 mOhm Max", Manufacturer="Taiyo Yuden", Manufacturer Part Number=BKP0603HS121-T, Part number IPS=00000001252, Part number Norautron=N.A., Supplier Part Number 1=587-3286-1-ND, Artikkelnr Noca=N.A., Author=rsk, Component Class=Inductors, ComponentLink1Description=Datasheet, ComponentLink1URL=N.A., ComponentLink2Description="Supplier link", ComponentLink2URL=N.A., Footprint Doc=0201, HelpURL=http://ds.yuden.co.jp/TYCOMPAS/ut/detail.do?productNo=BKP0603HS121-T&fileName=BKP0603HS121-T_SS&mode=specSheetDownload, LatestRevisionDate=2019-01-29, Note="Chip EMIFIL Inductor Type Chip Ferrite Bead", Pad Count=2, Part Number=FB0201-120R@100M-850mA, PartId=100300097, Published=2016-08-23, Supplier 1=Digi-Key, Supplier 2=N.A., Supplier Part Number 2=N.A.
Fid1: library part Fid-Mark-Square, "Fiducial Mark", Manufacturer=N.A., Artikkelnr Noca=N.A., Author=rsk, Component Class=Connectors, ComponentLink1Description=Datasheet, ComponentLink1URL=N.A., ComponentLink2Description="Supplier link", ComponentLink2URL=N.A., Footprint Doc=Fiducial, HelpURL=N.A., LatestRevisionDate=2017-01-30, Manufacturer Part Number=N.A., Note=N.A., Pad Count=1, Part Number=Fid-Mark-Square, Part number IPS=N.A., Part number Norautron=N.A., PartId=100500074, Published=2009-12-12, Supplier 1=N.A., Supplier 2=N.A., Supplier Part Number 1=N.A., Supplier Part Number 2=N.A.
Fid2: library part Fid-Mark, "Fiducial Mark", Manufacturer=N.A., Artikkelnr Noca=N.A., Author=rsk, Component Class=Connectors, ComponentLink1Description=Datasheet, ComponentLink1URL=N.A., ComponentLink2Description="Supplier link", ComponentLink2URL=N.A., Footprint Doc=Fiducial, HelpURL=N.A., LatestRevisionDate=2009-12-12, Manufacturer Part Number=N.A., Note=N.A., Pad Count=1, Part Number=Fid-Mark, Part number IPS=N.A., Part number Norautron=N.A., PartId=100500073, Published=2009-12-12, Supplier 1=N.A., Supplier 2=N.A., Supplier Part Number 1=N.A., Supplier Part Number 2=N.A.
GND2 GND3: library part "Castellated Hole 0.9mm_S", "Castellated Hole 0.9mm", Manufacturer=N.A., Artikkelnr Noca=N.A., Author=rsk, Component Class=Connectors, ComponentLink1Description=Datasheet, ComponentLink1URL=N.A., ComponentLink2Description="Supplier link", ComponentLink2URL=N.A., Footprint Doc=N.A., HelpURL=N.A., LatestRevisionDate=2018-01-24, Manufacturer Part Number=N.A., Note=N.A., Pad Count=1, Part Number="Castellated Hole 0.9mm_S", Part number IPS=N.A., Part number Norautron=N.A., PartId=100500566, Published=2018-01-24, Supplier 1=N.A., Supplier 2=N.A., Supplier Part Number 1=N.A., Supplier Part Number 2=N.A.
J1: library part USB-A-PCB, "USB-A PCB footprint", Manufacturer=N.A., Artikkelnr Noca=N.A., Author=rsk, Component Class=Connectors, ComponentLink1Description=Datasheet, ComponentLink1URL=N.A., ComponentLink2Description="Supplier link", ComponentLink2URL=N.A., Footprint Doc=USB-A-PCB, HelpURL=N.A., LatestRevisionDate=2014-06-04, Manufacturer Part Number=N.A., Note=N.A., Pad Count=4, Part Number=USB-A-PCB, Part number IPS=N.A., Part number Norautron=N.A., PartId=100500219, Published=2014-06-04, Supplier 1=N.A., Supplier 2=N.A., Supplier Part Number 1=N.A., Supplier Part Number 2=N.A.
J2: library part TC2050-IDC-NLFP, "CBL PLUG-OF-NAILS 10-PIN", Manufacturer="Tag-Connect LLC", Part number IPS=N.A., Supplier Part Number 1=TC2050-IDC-NL-ND, Artikkelnr Noca=N.A., Author=rsk, Component Class=Connectors, ComponentLink1Description=Datasheet, ComponentLink1URL=N.A., ComponentLink2Description="Supplier link", ComponentLink2URL=N.A., Footprint Doc=TC2050-IDC-NLFP, HelpURL=http://www.tag-connect.com/Materials/TC2050-IDC%20Datasheet.pdf, LatestRevisionDate=2012-11-21, Manufacturer Part Number=TC2050-IDC-NLFP, Note=N.A., Pad Count=10, Part Number=TC2050-IDC-NLFP, Part number Norautron=N.A., PartId=100500463, Published=2012-11-21, Supplier 1=Digi-Key, Supplier 2=N.A., Supplier Part Number 2=N.A.
L1: library part L0201-4n7, "Inductor, 350mA, ±3%", Manufacturer=Murata, Manufacturer Part Number=LQP03TN4N7H02D, Part number IPS=00000001792, Part number Norautron=N.A., Artikkelnr Noca=N.A., Author=rsk, Component Class=Inductors, ComponentLink1Description=Datasheet, ComponentLink1URL=N.A., ComponentLink2Description="Supplier link", ComponentLink2URL=N.A., Footprint Doc=0201, HelpURL=N.A., LatestRevisionDate=2013-04-10, Note=N.A., Pad Count=2, Part Number=L0201-4n7, PartId=100300024, Published=2013-04-10, Supplier 1=N.A., Supplier 2=N.A., Supplier Part Number 1=N.A., Supplier Part Number 2=N.A.
L2: library part L0201-2n2, "Chip Inductor", Manufacturer=N.A., Artikkelnr Noca=N.A., Author=rsk, Component Class=Inductors, ComponentLink1Description=Datasheet, ComponentLink1URL=N.A., ComponentLink2Description="Supplier link", ComponentLink2URL=N.A., Footprint Doc=0201, HelpURL=N.A., LatestRevisionDate=2013-04-10, Manufacturer Part Number=N.A., Note="High frequency chip inductor ±5%", Pad Count=2, Part Number=L0201-2n2, Part number IPS=N.A., Part number Norautron=N.A., PartId=100300017, Published=2013-04-10, Supplier 1=N.A., Supplier 2=N.A., Supplier Part Number 1=N.A., Supplier Part Number 2=N.A.
L3: library part L0603-10µ-TDK, "Inductor, 250mA, ±20%, 1.05ohm. -55°C ~ 125°C", Manufacturer="TDK Corporation", Manufacturer Part Number=MLZ1608M100WTD25, Part number IPS=N.A., Supplier Part Number 1=445-175588-1-ND, Artikkelnr Noca=N.A., Author=rsk, Component Class=Inductors, ComponentLink1Description=Datasheet, ComponentLink1URL=N.A., ComponentLink2Description="Supplier link", ComponentLink2URL=N.A., Footprint Doc=0603, HelpURL=https://product.tdk.com/info/en/catalog/datasheets/inductor_automotive_decoupling_mlz1608_en.pdf, LatestRevisionDate=2012-09-19, Note=N.A., Pad Count=2, Part Number=L0603-10µ-TDK, Part number Norautron=N.A., PartId=100300079, Published=2019-05-06, Supplier 1=Digi-Key, Supplier 2=Mouser, Supplier Part Number 2=810-MLZ1608M100WTD25
L4: library part L0402-15n, "Inductor, 320mA, ±5%", Manufacturer="Taiyo Yuden", Manufacturer Part Number=HK100515NJ-T, Part number IPS=00000001262, Part number Norautron=N.A., Supplier Part Number 1=587-1521-1-ND, Artikkelnr Noca=33029323, Author=rsk, Component Class=Inductors, ComponentLink1Description=Datasheet, ComponentLink1URL=N.A., ComponentLink2Description="Supplier link", ComponentLink2URL=N.A., Footprint Doc=0402, HelpURL=http://www.yuden.co.jp/productdata/catalog/en/mlci04_e.pdf, LatestRevisionDate=2012-09-19, Note="High frequency chip inductor ±10%", Pad Count=2, Part Number=L0402-15n, PartId=100300056, Published=2010-07-12, Supplier 1=Digi-Key, Supplier 2=Farnell, Supplier Part Number 2=658-1328
L5: library part L0201-2n7, "Chip Inductor", Manufacturer=N.A., Artikkelnr Noca=N.A., Author=rsk, Component Class=Inductors, ComponentLink1Description=Datasheet, ComponentLink1URL=N.A., ComponentLink2Description="Supplier link", ComponentLink2URL=N.A., Footprint Doc=0201, HelpURL=N.A., LatestRevisionDate=2013-04-10, Manufacturer Part Number=N.A., Note="High frequency chip inductor ±5%", Pad Count=2, Part Number=L0201-2n7, Part number IPS=N.A., Part number Norautron=N.A., PartId=100300019, Published=2013-04-10, Supplier 1=N.A., Supplier 2=N.A., Supplier Part Number 1=N.A., Supplier Part Number 2=N.A.
LD1: library part "VS 25C7M5", "LED, Green, 0603, 573nm, Vf=2.0V, 24mcd, - 40 to +85°C", Manufacturer="Victory Electronics", Part number IPS="00000001274, 00000009961", Part number Norautron=N.A., Artikkelnr Noca=13019193, Author=rsk, Component Class=Optoelectronics, ComponentLink1Description=Datasheet, ComponentLink1URL=N.A., ComponentLink2Description="Supplier link", ComponentLink2URL=N.A., Footprint Doc=0603, HelpURL="\\hizz\pro\app9717\Datasheet\optoelectronics\Victory Electronics\VS 25C7M5.pdf", LatestRevisionDate=2020-10-23, Manufacturer Part Number="VS 25C7M5", Note=N.A., Pad Count=2, Part Number="VS 25C7M5", PartId=101400097, Published=2017-08-21, Supplier 1="EC Partner", Supplier 2=N.A., Supplier Part Number 1=N.A., Supplier Part Number 2=N.A.
LD2: library part APHF1608LSEEQBDZGKC, "RGB LED 1.60 mm x 0.80 mm SMD", Manufacturer="Kingbright Company LLC", Part number IPS=00000001254, Part number Norautron=N.A., Supplier Part Number 1=754-2143-1-ND, Artikkelnr Noca=N.A., Author=rsk, Component Class=Optoelectronics, ComponentLink1Description=Datasheet, ComponentLink1URL=N.A., ComponentLink2Description="Supplier link", ComponentLink2URL=N.A., Footprint Doc=LED_RGB_0603, HelpURL=http://www.kingbrightusa.com/images/catalog/SPEC/APHF1608LSEEQBDZGKC.pdf, LatestRevisionDate=2017-11-09, Manufacturer Part Number=APHF1608LSEEQBDZGKC, Note=N.A., Pad Count=4, Part Number=APHF1608LSEEQBDZGKC, PartId=101400123, Published=2017-09-18, Supplier 1=Digi-Key, Supplier 2=N.A., Supplier Part Number 2=N.A.
P1: library part "Pin Header 2x5 SMD, 1.27mm, KS, N.C.", "Pin Header 2x5, 1.27mm (50mil), SMD, Keying Shroud", Manufacturer=W-CON, Manufacturer Part Number=3132-10MS0BK00R1, Part number IPS=N.A., Artikkelnr Noca=N.A., Assembly="Not mounted", Author=rsk, Component Class=Connectors, ComponentLink1Description=Datasheet, ComponentLink1URL=N.A., ComponentLink2Description="Supplier link", ComponentLink2URL=N.A., Footprint Doc=HDR_2x5-SMD-1.27mm, HelpURL=\\hizz\pro\app9717\Datasheet\connectors\W-CON\3132-XXMXXBK00XX.pdf, LatestRevisionDate=2017-09-07, Note=N.A., Pad Count=10, Part Number="Pin Header 2x5 SMD, 1.27mm, KS, N.C.", Part number Norautron=N.A., PartId=100500262, Published=2017-09-07, Supplier 1=Cabcon, Supplier 2=Samtec, Supplier Part Number 1=3132-10MS0BK00R1, Supplier Part Number 2=FTSH-105-01-F-DV-K
R2: library part R0201-10k, "Resistor, ±1%, 0.05W", Manufacturer=N.A., Part number IPS=00000001255, Artikkelnr Noca=N.A., Author=rsk, Component Class=Resistors, ComponentLink1Description=Datasheet, ComponentLink1URL=N.A., ComponentLink2Description="Supplier link", ComponentLink2URL=N.A., Footprint Doc=0201, HelpURL=N.A., LatestRevisionDate=2014-11-13, Manufacturer Part Number=N.A., Note="Chip Res 1%", Pad Count=2, Part Number=R0201-10k, Part number Norautron=N.A., PartId=100100065, Published=2014-11-13, Supplier 1=N.A., Supplier 2=N.A., Supplier Part Number 1=N.A., Supplier Part Number 2=N.A.
R3: library part R0201-220, "Resistor, ±1%, 0.05W", Manufacturer=N.A., Part number IPS=00000000863, Artikkelnr Noca=N.A., Author=rsk, Component Class=Resistors, ComponentLink1Description=Datasheet, ComponentLink1URL=N.A., ComponentLink2Description="Supplier link", ComponentLink2URL=N.A., Footprint Doc=0201, HelpURL=N.A., LatestRevisionDate=2014-11-13, Manufacturer Part Number=N.A., Note="Chip Res 1%", Pad Count=2, Part Number=R0201-220, Part number Norautron=N.A., PartId=100100032, Published=2014-11-13, Supplier 1=N.A., Supplier 2=N.A., Supplier Part Number 1=N.A., Supplier Part Number 2=N.A.
R4: library part R0201-1k2, "Resistor, ±1%, 0.05W", Manufacturer=N.A., Part number IPS=00000001256, Artikkelnr Noca=N.A., Author=rsk, Component Class=Resistors, ComponentLink1Description=Datasheet, ComponentLink1URL=N.A., ComponentLink2Description="Supplier link", ComponentLink2URL=N.A., Footprint Doc=0201, HelpURL=N.A., LatestRevisionDate=2014-11-13, Manufacturer Part Number=N.A., Note="Chip Res 1%", Pad Count=2, Part Number=R0201-1k2, Part number Norautron=N.A., PartId=100100045, Published=2014-11-13, Supplier 1=N.A., Supplier 2=N.A., Supplier Part Number 1=N.A., Supplier Part Number 2=N.A.
R5: library part R0201-2k2, "Resistor, ±1%, 0.05W", Manufacturer=N.A., Part number IPS=00000001257, Artikkelnr Noca=N.A., Author=rsk, Component Class=Resistors, ComponentLink1Description=Datasheet, ComponentLink1URL=N.A., ComponentLink2Description="Supplier link", ComponentLink2URL=N.A., Footprint Doc=0201, HelpURL=N.A., LatestRevisionDate=2014-11-13, Manufacturer Part Number=N.A., Note="Chip Res 1%", Pad Count=2, Part Number=R0201-2k2, Part number Norautron=N.A., PartId=100100052, Published=2014-11-13, Supplier 1=N.A., Supplier 2=N.A., Supplier Part Number 1=N.A., Supplier Part Number 2=N.A.
R6: library part R0201-390, "Resistor, ±1%, 0.05W", Manufacturer=N.A., Part number IPS=00000001258, Artikkelnr Noca=N.A., Author=rsk, Component Class=Resistors, ComponentLink1Description=Datasheet, ComponentLink1URL=N.A., ComponentLink2Description="Supplier link", ComponentLink2URL=N.A., Footprint Doc=0201, HelpURL=N.A., LatestRevisionDate=2014-11-13, Manufacturer Part Number=N.A., Note="Chip Res 1%", Pad Count=2, Part Number=R0201-390, Part number Norautron=N.A., PartId=100100035, Published=2014-11-13, Supplier 1=N.A., Supplier 2=N.A., Supplier Part Number 1=N.A., Supplier Part Number 2=N.A.
SB1 SB2: library part "Solderbridge Shorted", "Shorted Solderbridge", Manufacturer=N.A., Artikkelnr Noca=N.A., Author=rsk, Component Class=Connectors, ComponentLink1Description=Datasheet, ComponentLink1URL=N.A., ComponentLink2Description="Supplier link", ComponentLink2URL=N.A., Footprint Doc=Solderbridge_Shorted, HelpURL=N.A., LatestRevisionDate=2012-08-07, Manufacturer Part Number=N.A., Note=N.A., Pad Count=2, Part Number="Solderbridge Shorted", Part number IPS=N.A., Part number Norautron=N.A., PartId=100500459, Published=2012-08-07, Supplier 1=N.A., Supplier 2=N.A., Supplier Part Number 1=N.A., Supplier Part Number 2=N.A.
SW1: library part "PTS810 SJK 250 SMTR LFS", "Tactile Switch, SPNO, SMD, 260gf, 4.2x3.2x2.5mm", Manufacturer=C&K, Part number IPS=00000001259, Part number Norautron=N.A., Supplier Part Number 1=CKN10503TR-ND, Artikkelnr Noca=N.A., Author=rsk, Component Class=Switches, ComponentLink1Description=Datasheet, ComponentLink1URL=N.A., ComponentLink2Description="Supplier link", ComponentLink2URL=N.A., Footprint Doc=PTS810, HelpURL=http://www.ckswitches.com/media/1476/pts810.pdf, LatestRevisionDate=2017-11-09, Manufacturer Part Number="PTS810 SJK 250 SMTR LFS", Note=N.A., Pad Count=4, Part Number="PTS810 SJK 250 SMTR LFS", PartId=101500104, Published=2017-09-18, Supplier 1=Digi-Key, Supplier 2=N.A., Supplier Part Number 2=N.A.
SW2: "Microminiature SMT Switch, Side Actuated", Manufacturer=C&K, Part number IPS=00000001260, Part number Norautron=N.A., Supplier Part Number 1=CKN10508CT-ND, Artikkelnr Noca=50019089, Author=rsk, Component Class=Switches, ComponentLink1Description=Datasheet, ComponentLink1URL=N.A., ComponentLink2Description="Supplier link", ComponentLink2URL=N.A., Footprint Doc="PTS840 Gx", HelpURL=http://www.ck-components.com/80185/pts840_11june13.pdf/, LatestRevisionDate=2017-11-09, Manufacturer Part Number="PTS840 GK SMTR LFS", Note="Tactile Switch, SPST, SMD, 220gf", Pad Count=4, Part Number="PTS840 GK SMTR LFS", PartId=101500010, Published=2014-08-12, Supplier 1=Digi-Key, Supplier 2=Mouser, Supplier Part Number 2=611-PTS840GKSMTR
SWDCLK SWDIO: library part "Castellated Hole 0.9mm_D", "Castellated Hole 0.9mm", Manufacturer=N.A., Artikkelnr Noca=N.A., Author=rsk, Component Class=Connectors, ComponentLink1Description=Datasheet, ComponentLink1URL=N.A., ComponentLink2Description="Supplier link", ComponentLink2URL=N.A., Footprint Doc=N.A., HelpURL=N.A., LatestRevisionDate=2018-01-24, Manufacturer Part Number=N.A., Note=N.A., Pad Count=1, Part Number="Castellated Hole 0.9mm_D", Part number IPS=N.A., Part number Norautron=N.A., PartId=100500567, Published=2018-01-24, Supplier 1=N.A., Supplier 2=N.A., Supplier Part Number 1=N.A., Supplier Part Number 2=N.A.
U1: "Multi-protocol Bluetooth Low Energy, IEEE 802.15.4, ANT and 2.4GHz proprietary system-on-chip", Manufacturer="Nordic Semiconductor", Part number IPS=N.A., Artikkelnr Noca=N.A., Author=rsk, Component Class=nRF_Devices, ComponentLink1Description=Datasheet, ComponentLink1URL=N.A., ComponentLink2Description="Supplier link", ComponentLink2URL=N.A., Footprint Doc=QFN-40, HelpURL=N.A., LatestRevisionDate=2018-12-03, Manufacturer Part Number=nRF52833-QDAA, Note=N.A., Pad Count=40, Part Number=nRF52833-QDAA, Part number Norautron=N.A., PartId=102000125, Published=2018-12-03, Supplier 1="Nordic Semiconductor", Supplier 2=N.A., Supplier Part Number 1=nRF52833-QDAA, Supplier Part Number 2=N.A.
X1: library part XTAL_SMD1612_32MHz_8pF_General, "XTAL SMD 1612, 32MHz, Cl=8pF, Total Tol: ±40ppm", Manufacturer=N.A., Artikkelnr Noca=N.A., Author=rsk, Component Class=Oscillators, ComponentLink1Description=Datasheet, ComponentLink1URL=N.A., ComponentLink2Description="Supplier link", ComponentLink2URL=N.A., Footprint Doc=XTAL_1612, HelpURL=N.A., LatestRevisionDate=2016-08-19, Manufacturer Part Number=N.A., Note="XTAL SMD 32.000MHz", Pad Count=4, Part Number=XTAL_SMD1612_32MHz_8pF_General, Part number IPS=N.A., Part number Norautron=N.A., PartId=101600025, Published=2016-08-19, Supplier 1=N.A., Supplier 2=N.A., Supplier Part Number 1=N.A., Supplier Part Number 2=N.A.
X2: library part XTAL_SMD2012_32.768kHz_9pF_General, "XTAL SMD 2012, 32.768kHz, Cl=9pF, Total Tol: ±50ppm", Manufacturer=N.A., Artikkelnr Noca=N.A., Author=rsk, Component Class=Oscillators, ComponentLink1Description=Datasheet, ComponentLink1URL=N.A., ComponentLink2Description="Supplier link", ComponentLink2URL=N.A., Footprint Doc=XTAL_2012, HelpURL=N.A., LatestRevisionDate=2017-01-11, Manufacturer Part Number=N.A., Note="XTAL SMD 32.768kHz", Pad Count=2, Part Number=XTAL_SMD2012_32.768kHz_9pF_General, Part number IPS=N.A., Part number Norautron=N.A., PartId=101600011, Published=2016-08-19, Supplier 1=N.A., Supplier 2=N.A., Supplier Part Number 1=N.A., Supplier Part Number 2=N.A.

## Free pads (board coordinates)
  round 1.8 smd paste-5: 3(33.655,2.54) 3(33.655,12.7)
  round 1.8 smd far side paste-5: 3(33.655,2.54) 3(33.655,12.7)
  round 0.6 hole 0.6 unplated paste+0 mask+0.102: 4(1.6,0.1) 4(1.6,15.14) 4(2.6,0.1) 4(2.6,15.14) 4(3.6,0.1) 4(3.6,15.14) 4(40,1.71) 4(40,13.53) 4(41,1.71) 4(41,13.53) 4(42,1.71) 4(42,13.53)

## Via types
v1: diameter 0.5, hole 0.25, Top Layer to Bottom Layer, tented both sides, 135 vias

## Nets (pads, with @x,y where several pads share a name; then routed paths per layer and width w, separated by ;. In a path a pad name is that pad's centre, name@x,y a point inside that pad or via, vN(x,y) a via of type N, cw(c..) or ccw(c..) an arc to the next point about the centre after c; other vN are vias at no path point)
ANT: C26.2 L5.2 | length 30.6
  Top Layer w0.254: 3.327,12.846 0.363,12.846 0.363,10.966 3.332,10.966 3.332,9.01 0.363,9.01 0.363,7.029 3.307,7.029 3.307,4.972 0.363,4.972 0.363,2.754 L5.2@6.09,2.754
D_N: D1.2 DN.1 SB1.1 U1.12 | length 21.1
  Top Layer w0.2: 19.975,11.401 19.975,11.376 ; U1.12 cw(c20.06,10.43) 19.975,10.43 19.975,11.376 ; SB1.1 33.3,7.332 ccw(c33,7.032) 33,7.457 32.15,7.457 ccw(c32.15,6.836) 31.53,6.836 cw(c31.189,6.836) D1.2 ccw(c30.163,6.595) 31.059,7.491 cw(c32.632,9.065) 30.407,9.065 30.407,11.456 ccw(c28.839,11.456) 28.839,13.023 26.162,13.023 ccw(c26.162,12.345) 25.682,12.825 cw(c24.096,14.41) 24.096,12.168 20.9,12.168 ccw(c20.9,11.149) 20.18,11.87 ccw(c20.674,11.376) 19.975,11.376
  other v1: 33.45,7.295
D_P: D1.3 DP.1 SB2.1 U1.13 | length 20
  Top Layer w0.2: U1.13 ccw(c19.537,10.433) 19.626,10.433 19.626,11.429 ; 19.626,11.454 19.626,11.429 ; SB2.1 33.3,7.908 cw(c33,8.208) 33,7.783 32.2,7.783 cw(c32.2,8.454) 31.53,8.454 ccw(c31.309,8.454) 31.465,8.61 D1.3 ccw(c30.163,8.645) 31.059,9.541 cw(c31.843,10.325) 30.734,10.325 30.734,11.456 ccw(c28.839,11.456) 28.839,13.35 26.162,13.35 ccw(c26.162,12.345) 25.451,13.056 cw(c24.096,14.41) 24.096,12.495 20.9,12.495 ccw(c20.9,11.074) 19.895,12.079 ccw(c20.546,11.429) 19.626,11.429
  other v1: 33.45,7.945
DEC1: C5.1 U1.1 | length 1.6
  Top Layer w0.2: U1.1 21.333,6.17 21.879,5.624 C5.1@22.375,5.624
DEC3: C10.1 U1.27 | length 1.9
  Top Layer w0.2: C10.1@14.485,6.917 15.279,6.917 15.732,7.37 U1.27
DEC4_6: C9.2 C13.2 C14.1 L4.1 U1.26 U1.38 | length 14
  Top Layer w0.2: C9.2 15.335,7.5 15.605,7.77 U1.26 ; L4.1 19.406,3.38 C13.2 ; U1.38 19.6,4.655 19.678,4.655 v1@19.736,4.597 ; C13.2@19.743,3.423 v1(19.743,4.604)
  Mid-Layer 2 w0.2: v1(15.044,7.472) 15.282,7.234 15.282,4.538 16.23,3.59 19.22,3.59 19.768,4.138 v1@19.768,4.554
GND: C1.2 C2.2 C3.1 C4.1 C5.2 C6.2 C7.2 C8.2 C9.1 C10.2 C11.2 C12.2 C13.1 C14.2 C15.2 C16.2 C17.2 C19.2 C21.1 C22.1 C23.1 C24.1 C25.2 C26.1 C27.1 D1.1 FB2.2 GND1.1 GND2.1 GND3.1 GND4.1 J2.3 P1.3 P1.5 P1.9 SW1.2 SW2.2 U1.25 U1.37 U1.41 X1.2 X1.4 | length 21.4
  Top Layer w0.203: C22.1 28.12,5.52 28.12,5.89 28.5,6.27 v1(28.5,6.295) ; v1(28.524,9.449) 28.524,9.906 28.829,10.211 C23.1 29.027,10.021 C24.1 ; C21.1 29.204,4.73 v1(29.667,4.267)
  Top Layer w0.229: v1(12.4,4.62) 12.885,4.62 X1.2 13.311,4.194 C2.2@13.311,3.665 ; C1.2 13.881,5.624 X1.4 v1(14.714,5.484) ; C3.1@14.909,8.085 14.994,8.17 U1.41@17.825,8.17 ; 17.806,3.461 18.518,4.173 ; v1@18.975,4.32 18.975,4.604 19.2,4.829 U1.41@19.2,7.5 ; v1@18.981,4.503 19.115,4.369 C14.2@19.115,4.08
  Top Layer w0.254: C26.1 5.516,3.333 5.524,3.341 5.524,3.975 v1(5.537,3.988) ; C25.2 7.239,4.039 ; 13.1,7.497 C4.1 ; 14.625,11.485 14.83,11.28 15.192,11.28 C8.2 ; C8.2@15.175,11.272 15.183,11.264 15.539,11.264 15.708,11.095 v1(15.775,11.095) ; C27.1 15.466,12.049 15.466,11.752 15.708,11.509
  Bottom Layer w0.145: v1(29.54,7.544) 30.293,8.297 31.464,8.297 J2.3@32.131,7.63
  other v1: 6.858,0.508 6.647,1.638 5.436,1.674 22.275,1.674 23.492,1.786 24.79,1.88 9.677,2.093 30.251,2.134 29.077,2.335 10.274,2.563 17.725,2.57 21.479,2.566 12.645,2.72 13.903,2.735 27.026,2.743 11.043,2.892 25.933,2.896 30.093,2.892 15.125,3.045 23.8,3.045 24.45,3.045 6.093,3.742 6.837,3.864 7.591,3.864 11.018,3.861 8.344,3.909 11.678,4.162 25.648,4.162 22.39,4.316 28.625,4.37 8.867,4.451 18.981,4.478 11.139,4.606 8.904,5.204 11.146,5.36 12.313,5.432 26.425,5.579 8.904,5.958 11.146,6.114 5.436,6.655 8.904,6.712 11.678,6.702 11.151,6.868 17.5,6.87 18.6,6.87 19.7,6.87 13.215,6.941 6.858,7.112 26.37,7.27 8.989,7.461 28.501,7.47 11.592,7.479 12.334,7.609 24.75,7.72 17.5,7.97 18.6,7.97 19.7,7.97 9.292,8.233 5.875,8.581 28.575,8.712 9.684,8.787 24.3,8.97 17.5,9.07 18.6,9.07 19.7,9.07 10.255,9.28 5.463,9.483 10.93,9.614 12.75,9.761 11.977,9.782 6.925,9.884 24.244,10.22 10.897,10.363 7.233,10.512 28.625,10.731 6.899,11.091 24.252,11.495 5.445,11.78 13.05,12.445 10.944,12.482 17.5,12.595 8.47,13.42 13.725,13.398 12.05,13.462 5.513,13.57 6.731,14.63
LED1: 0.15.1 R3.2 U1.14 | length 18.7
  Top Layer w0.15: 18.415,15.24 18.415,13.93 19.45,12.895 v1(19.45,12.536) 19.45,12.441 19.2,12.191 U1.14 ; R3.2 26.98,7.91 27.325,7.565 v1(27.325,6.988)
  Mid-Layer 2 w0.15: v1(19.45,12.536) 19.609,12.695 21.581,12.695 22.184,12.092 25.452,12.092 25.772,11.772 25.772,8.54 v1(27.325,6.988)
LED2_B: 0.29.1 R6.1 U1.34 | length 27.5
  Top Layer w0.15: 0.29.1@15.875,0 15.875,1.37 16.575,2.07 16.575,3.672 18,5.097 U1.34 ; v1@26.401,10.92 26.406,10.916 26.406,10.469 R6.1
  Mid-Layer 2 w0.15: 0.29.1@15.875,0 15.875,1.343 16.35,1.818 21.772,1.818 26.212,6.259 27.627,6.259 28.054,6.686 28.054,7.289 26.501,8.842 v1(26.501,10.92)
LED2_G: 0.28.1 R5.1 U1.33 | length 34.1
  Top Layer w0.15: 0.28.1@13.335,0 13.335,0.48 14.408,1.553 15.634,1.553 16.275,2.194 16.275,3.796 17.6,5.121 U1.33 ; R5.1 26.41,9.633 25.9,10.144 25.9,11.07 26.325,11.495 26.636,11.495 v1@26.65,11.509
  Mid-Layer 2 w0.15: 0.28.1@13.335,0 13.335,0.45 14.98,2.095 21.657,2.095 26.097,6.536 27.512,6.536 27.777,6.8 27.777,7.175 26.049,8.902 26.049,11.419 26.176,11.546 v1@26.627,11.546
  other v1: 26.651,11.57
LED2_R: 0.20.1 R4.2 U1.17 | length 21.9
  Top Layer w0.15: 13.335,15.24 13.335,14.79 14.453,13.672 16.148,13.672 16.573,13.247 17.723,13.247 17.998,12.972 17.998,11.958 18,11.956 U1.17 ; R4.2@26.981,8.771 v1@27.526,8.771
  Mid-Layer 2 w0.15: v1(17.998,12.995) 21.673,12.995 22.299,12.369 25.567,12.369 25.852,12.084 27.011,12.084 27.526,11.569 v1(27.526,8.77)
NetC3_2: C3.2 L1.1 U1.24 | length 1.9
  Top Layer w0.229: L1.1 14.894,8.67 14.909,8.655 14.994,8.57 U1.24@16.15,8.57
NetC4_2: C4.2 L1.2 L2.1 | length 1.2
  Top Layer w0.3: L2.1 L1.2
NetC8_1: C8.1 U1.21 | length 1.5